# Altium PCB power_supply.PcbDoc
Units mil, origin at the board's own origin, x right, y up, seen from the top; angles counter-clockwise.
Board outline 1355 x 2640 mil, 2 copper layers (Top Layer, Bottom Layer); 14 components, 4 nets, 40 pads, 8 vias.
Unrouted connection lines stored in the file: 1.
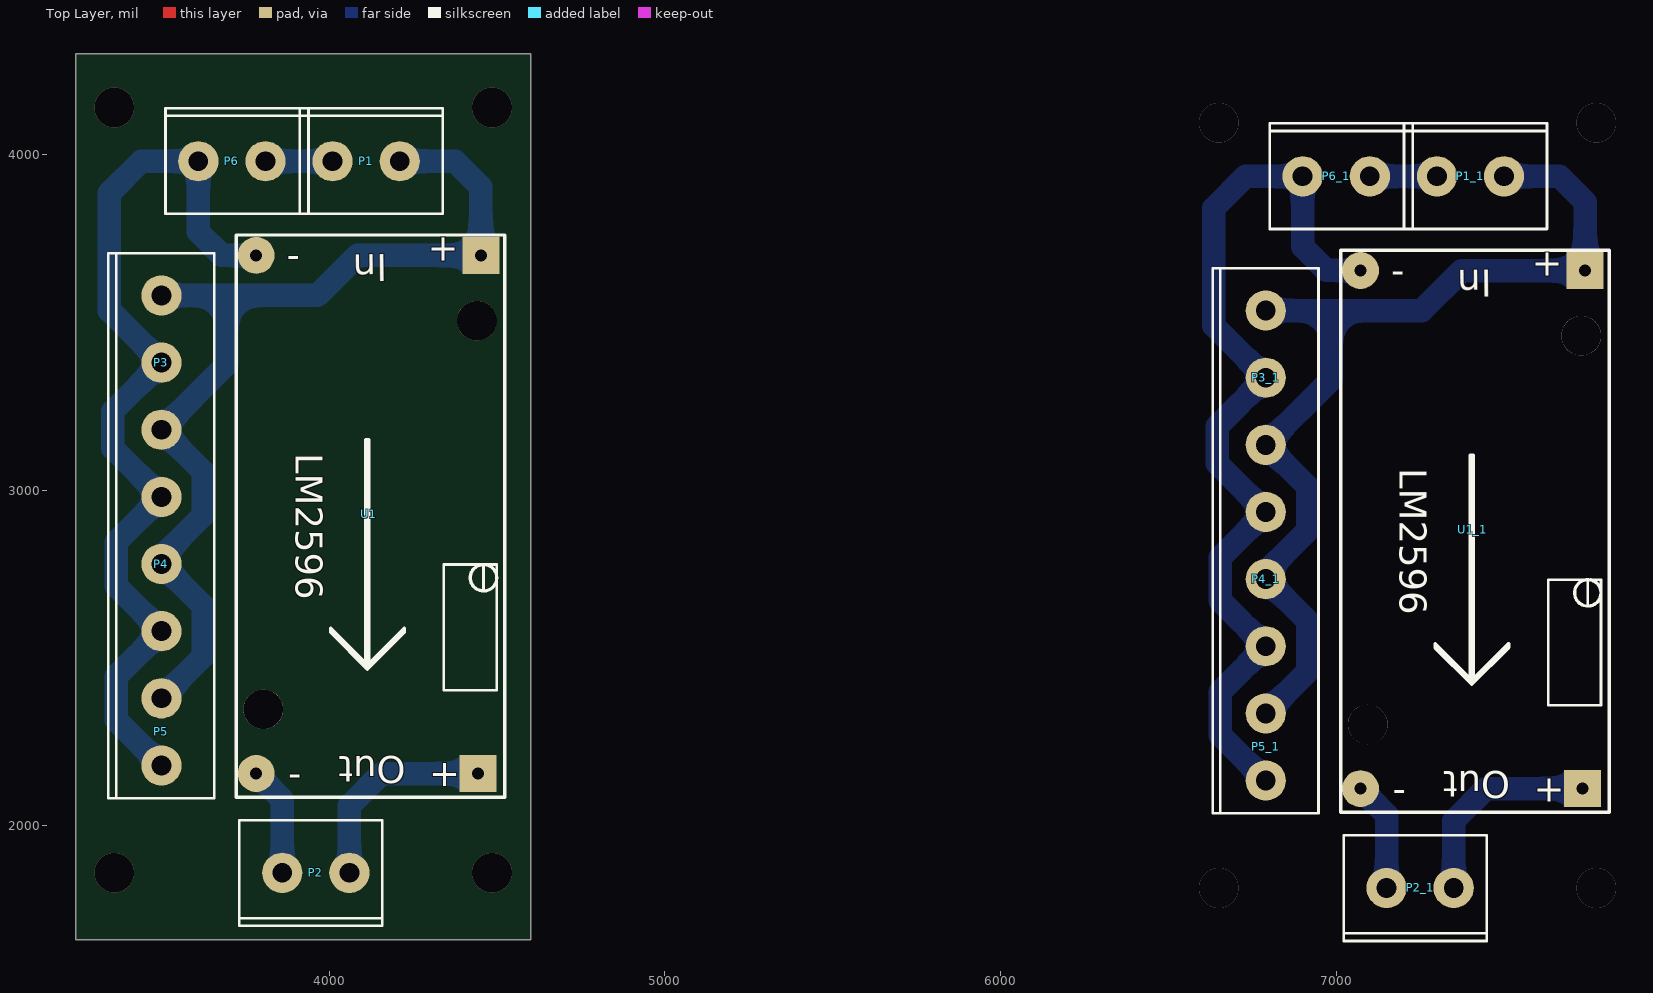
[diagram p0: Top Layer view]
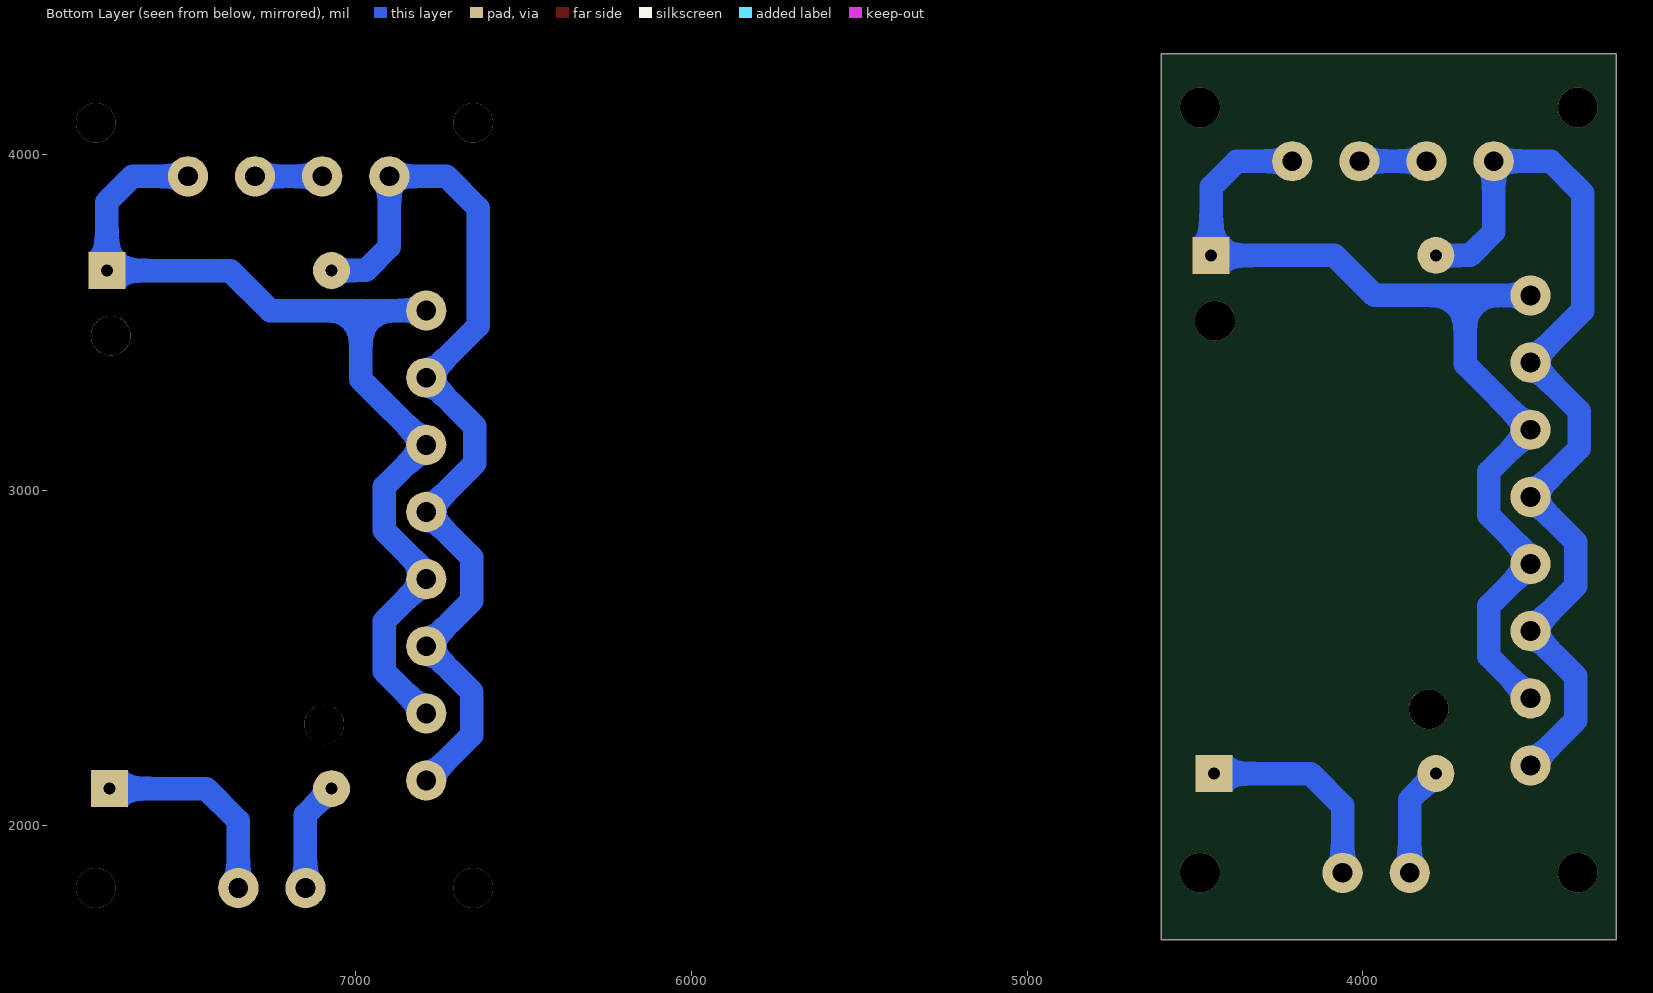
[diagram p1: Bottom Layer view, seen from below]

## Layer stack, top to bottom
Top Solder: solder mask 0.4, Solder Resist, Dk 3.5
Top Layer: signal copper 1.4
Dielectric 1: dielectric 12.6, FR-4, Dk 4.8
Bottom Layer: signal copper 1.4
Bottom Solder: solder mask 0.4, Solder Resist, Dk 3.5

## Board outline
3245,1660 3245,4300 4600,4300 4600,1660

## Design rules (kind name [scope] priority, off if disabled: settings)
Clearance [All] p1: gap=10 ignorepadtopadclearanceinfootprint=FALSE except(0: Arc-Hole Track-Hole SMDPad-Hole THPad-Hole Via-Hole Fill-Hole Poly-Hole Region-Hole Text-Hole)
PolygonConnect [All] p1: connectstyle=Relief reliefconductorwidth=10 reliefentries=4 polygonreliefangle="90 Angle" airgapwidth=10
RoutingVias [All] p1: holewidth=28 width=50 viastyle="Through Hole" minholewidth=28 minwidth=50 maxholewidth=28 maxwidth=50
SolderMaskExpansion [All] p1: expansion=4
Width [All] p1: maxlimit=100 minlimit=40 preferedwidth=40
30 further rules are at their usual default settings.

## Classes and differential pairs
component class power_supply: P1 P2 P3 P4 P5 P6 U1

## Components (designator, comment, footprint, x,y, rotation, side; value= is the part's Value field where it differs from the comment)
P1 "Header 2" 2PIN-5.08A 4010,3980 r0 top
P1_1 "Header 2" 2PIN-5.08A 7300,3935 r0 top (schematic designator P1)
P2 "Header 2" 2PIN-5.08A 4060,1860 r180 top
P2_1 "Header 2" 2PIN-5.08A 7350,1815 r180 top (schematic designator P2)
P3 "Header 3" 3PIN-5.08A 3500,3180 r90 top
P3_1 "Header 3" 3PIN-5.08A 6790,3135 r90 top (schematic designator P3)
P4 "Header 3" 3PIN-5.08A 3500,2580 r90 top
P4_1 "Header 3" 3PIN-5.08A 6790,2535 r90 top (schematic designator P4)
P5 "Header 2" 2PIN-5.08A 3500,2180 r90 top
P5_1 "Header 2" 2PIN-5.08A 6790,2135 r90 top (schematic designator P5)
P6 "Header 2" 2PIN-5.08A 3610,3980 r0 top
P6_1 "Header 2" 2PIN-5.08A 6900,3935 r0 top (schematic designator P6)
U1 "" LM2596 4123.36,2932.2 r270 top
U1_1 "" LM2596 7413.36,2887.2 r270 top (schematic designator U1)

## Footprints (in the part's own frame and the unit in brackets; to place one, negate y for a bottom-side part, rotate by r counter-clockwise, add the part's x,y. Pads: shape width x height; smd on the part's side, far side on the other; paste and mask are expansions set on the pad)
2PIN-5.08A [mil]
  round 120 hole 59.06: 1(0,0) 2(200,0)
  silkscreen extent -98,-157 328,158, body extent -100,-205 329,181, height 559
3PIN-5.08A [mil]
  round 120 hole 59.06: 1(0,0) 2(200,0) 3(400,0)
  silkscreen extent -104,-157 526,158, body extent -100,-205 530,181, height 559
LM2596 [mm]
  rect 2.794x2.794 hole 0.91: 1(-19.487,8.338) 3(19.719,8.137)
  round 2.794 hole 0.91: 2(-19.489,-8.663) 4(19.721,-8.66)
  round 3 hole 3 unplated: ""(-14.549,8.043) ""(14.862,-8.119)
  silkscreen extent -21.03,-10.16 21.51,10.16

## Part data
P1 P1_1 P2 P2_1 P5 P5_1 P6 P6_1: library part 二口插座, "Header, 2-Pin", LatestRevisionDate=17-Jul-2002, LatestRevisionNote="Re-released for DXP Platform.", Publisher="Altium Limited"
P3 P3_1 P4 P4_1: library part 三口插座, "Header, 3-Pin", LatestRevisionDate=17-Jul-2002, LatestRevisionNote="Re-released for DXP Platform.", Publisher="Altium Limited"
U1 U1_1: library part LM2596模块-29AH

## Via types
v1: diameter 118.11, hole 118.11, Top Layer to Bottom Layer, 8 vias

## Nets (pads, with @x,y where several pads share a name; then routed paths per layer and width w, separated by ;. In a path a pad name is that pad's centre, name@x,y a point inside that pad or via, vN(x,y) a via of type N, cw(c..) or ccw(c..) an arc to the next point about the centre after c; other vN are vias at no path point)
+5: P2.1 U1.3 | length 623.4
  Bottom Layer w70: P2.1 4060,2060 4155.87,2155.87 U1.3
+24: P1.1 P6.2 | length 200
  Bottom Layer w70: P6.2 P1.1
GND: P2.2 P3.2 P4.1 P4.3 P5.1 P6.1 U1.2 U1.4 | length 3156.8
  Bottom Layer w70: P5.1 3365,2315 3365,2445 P4.1 3365,2715 3365,2845 P4.3 3355,3125 3355,3235 P3.2 3345,3535 3345,3885 3440,3980 P6.1 3610,3770 3680.5,3699.5 U1.2 ; U1.4 3860,2078.2 P2.2
VCC-24: P1.2 P3.1 P3.3 P4.2 P5.2 U1.1 | length 2966.3
  Bottom Layer w70: P5.2 3625,2505 3625,2655 P4.2 3500,2800 3625,2925 3625,3055 P3.1 3695,3375 3695,3580 ; P3.3 3695,3580 ; P1.2 4375,3980 4451.64,3903.36 U1.1 4084.39,3699.39 3965,3580 3695,3580
pads on no net: P1_1.1 P1_1.2 P2_1.1 P2_1.2 P3_1.1 P3_1.2 P3_1.3 P4_1.1 P4_1.2 P4_1.3 P5_1.1 P5_1.2 P6_1.1 P6_1.2 U1. U1_1. U1_1.1 U1_1.2 U1_1.3 U1_1.4
copper on no net: | length 6946.6
  Bottom Layer w70: 6790,2135 6655,2270 6655,2400 6790,2535 6655,2670 6655,2800 6790,2935 6645,3080 6645,3190 6790,3335 6635,3490 6635,3840 6730,3935 6900,3935 6900,3725 6970.5,3654.5 7072.3,3654.5 ; 6790,2335 6915,2460 6915,2610 6790,2735 6790,2755 6915,2880 6915,3010 6790,3135 6985,3330 6985,3535 ; 6790,3535 6985,3535 ; 7072.4,2110.8 7150,2033.2 7150,1815 ; 7100,3935 7300,3935 ; 7350,1815 7350,2015 7445.87,2110.87 7733.72,2110.87 ; 7500,3935 7665,3935 7741.64,3858.36 7741.64,3654.39 7374.39,3654.39 7255,3535 6985,3535
  other v1: 6650,1815 7775,1815 3360,1860 4485,1860 6650,4095 7775,4095 3360,4140 4485,4140

## Silkscreen, mask and mechanical layers (free items; w line width, h text height)
Mechanical 1:
  lines w10: 3245,1660 4600,1660 4600,4300 3245,4300 3245,1660 ; 6535,1615 6535,4255 7890,4255 7890,1615 6535,1615

## Text inside footprints (layer, text, board x,y; h text height)
U1: Top Overlay "LM2596" at 3899.7,3109.8 h80 r270; Top Overlay "Out" at 4228.36,2207.2 h80 r180; Top Overlay "In" at 4173.36,3702.2 h80 r180.62; Top Overlay "-" at 3878.36,2117.2 h80; Top Overlay "-" at 3873.36,3662.2 h80; Top Overlay "+" at 4373.36,3672.2 h80 r90; Top Overlay "+" at 4298.36,2117.2 h80
U1_1: Top Overlay "+" at 7588.36,2072.2 h80; Top Overlay "+" at 7663.36,3627.2 h80 r90; Top Overlay "-" at 7163.36,3617.2 h80; Top Overlay "-" at 7168.36,2072.2 h80; Top Overlay "In" at 7463.36,3657.2 h80 r180.62; Top Overlay "Out" at 7518.36,2162.2 h80 r180; Top Overlay "LM2596" at 7189.7,3064.8 h80 r270